# Altium PCB MiniPCBR2.PcbDoc (part 1 of 2)
Units mil, origin at the board's own origin, x right, y up, seen from the top; angles counter-clockwise.
Board outline 669.97 x 965.45 mil, 4 copper layers (Top Layer, GND, PWR, Bottom Layer), stack 30.2 mil thick; 95 components, 51 nets, 371 pads, 97 vias.
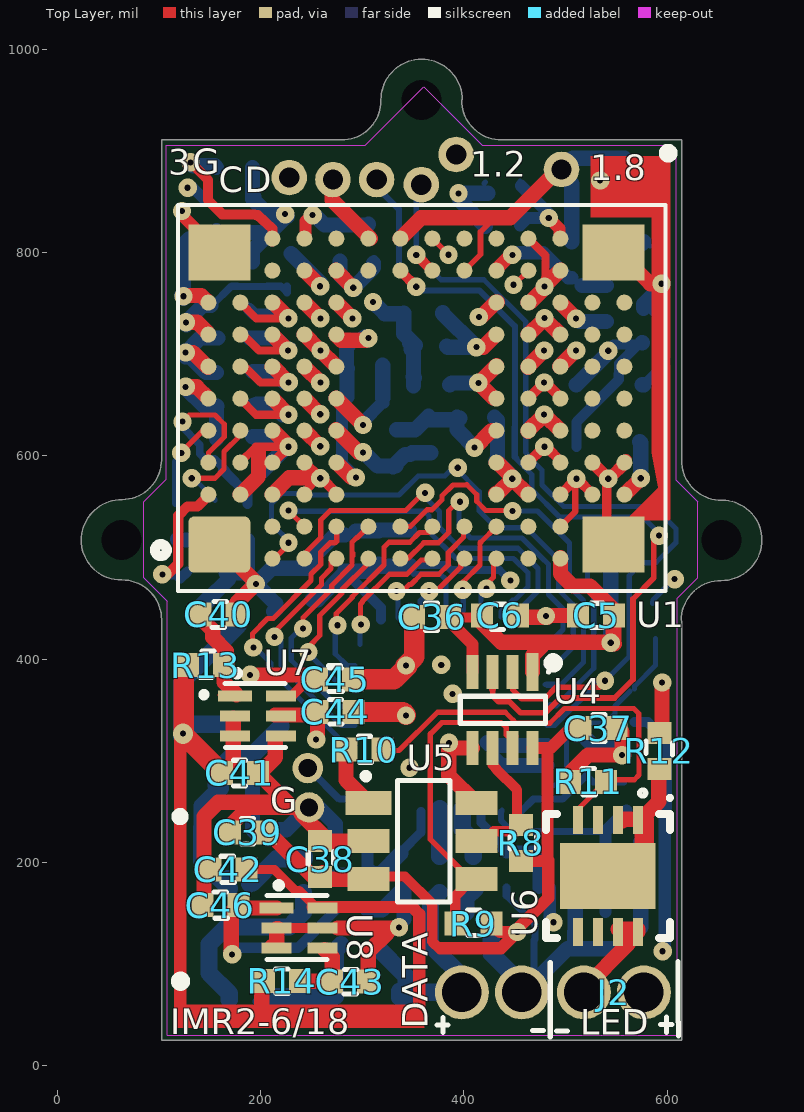
[diagram p0: Top Layer view]
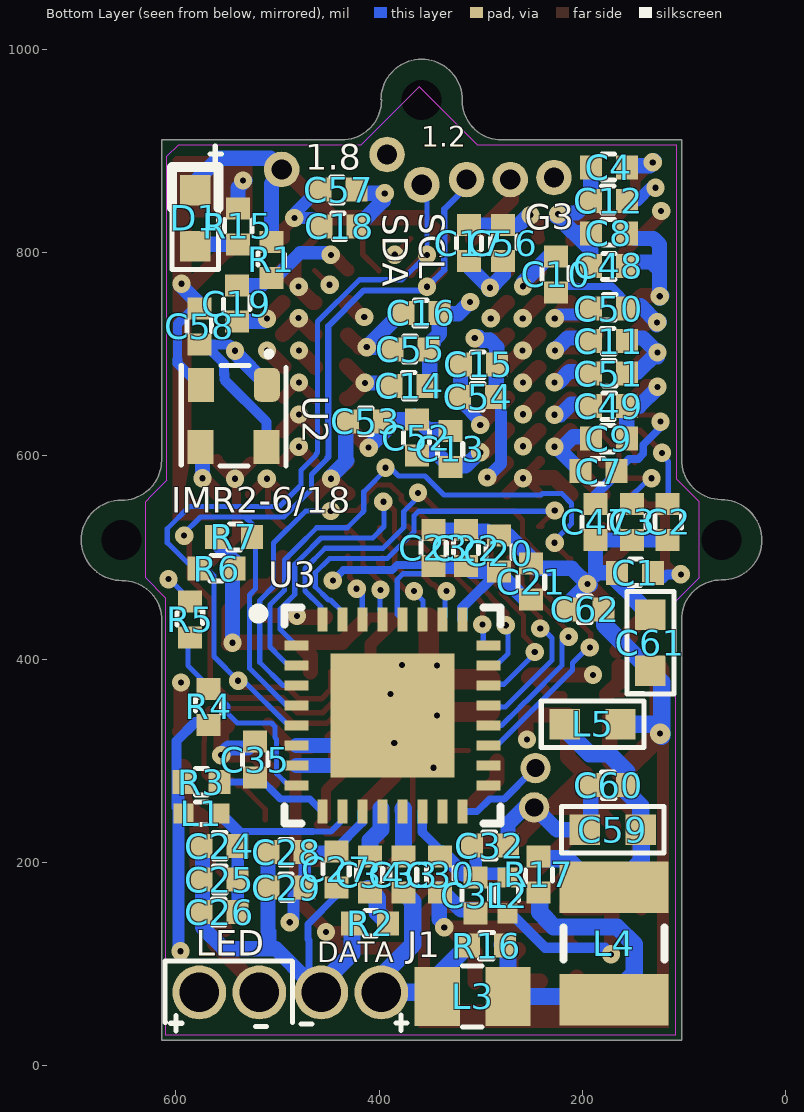
[diagram p1: Bottom Layer view, seen from below]
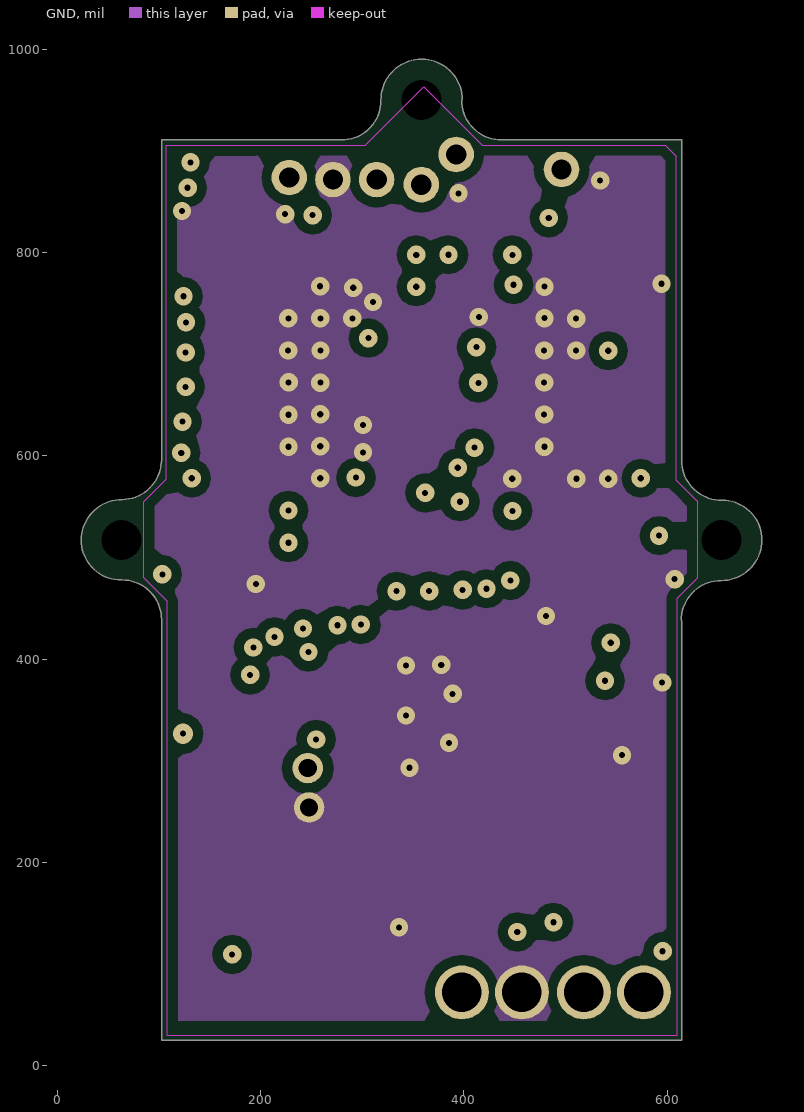
[diagram p2: GND]
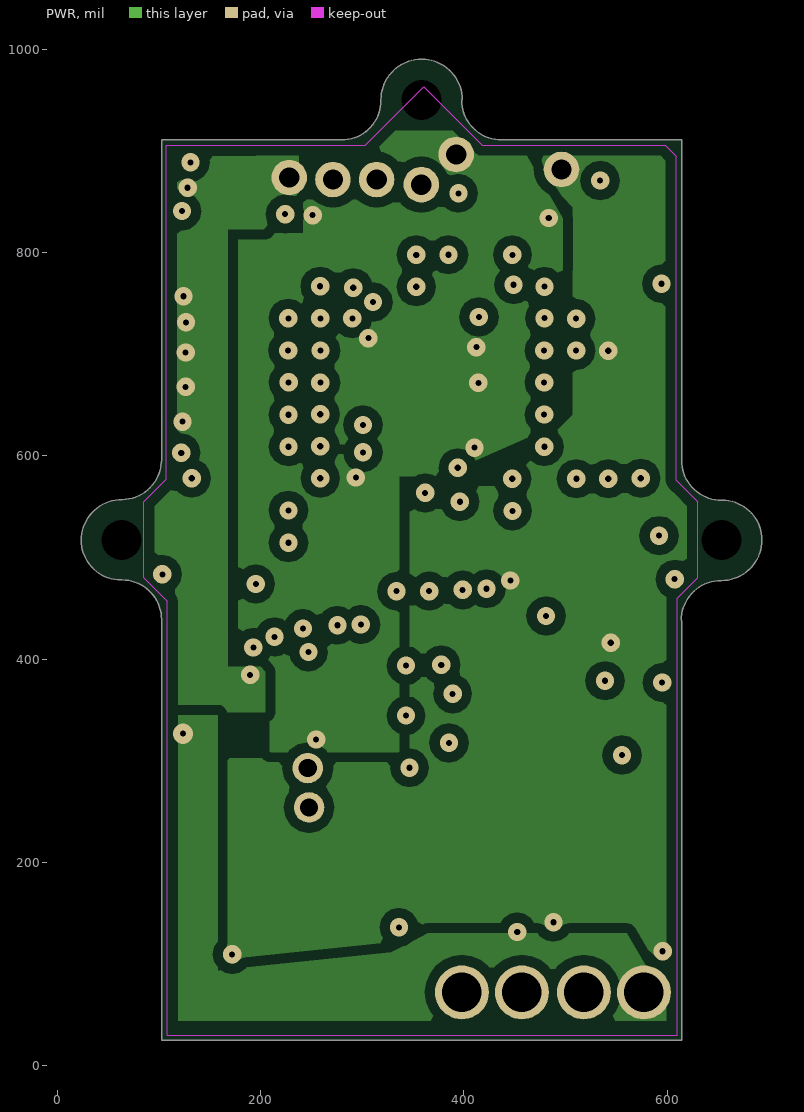
[diagram p3: PWR]

## Layer stack, top to bottom
Top Solder: solder mask 0.4, Solder Resist, Dk 3.5
Top Layer: signal copper 1.4
Dielectric1: core 6, FR-4 High TG, Dk 4.8
GND: signal copper 1.4
Dielectric2: prepreg 12.6, FR-4 High TG, Dk 4.8
PWR: signal copper 1.4
Dielectric3: core 6, FR-4 High TG, Dk 4.8
Bottom Layer: signal copper 1.4
Bottom Solder: solder mask 0.4, Solder Resist, Dk 3.5

## Board outline
62.32,477.95 63.33,477.95 cw(c63.33,438.92) 102.36,438.92 102.36,261.41 102.36,261.42 102.36,25 614.17,25 614.17,261.42 614.17,261.41 614.17,437.42 613.84,438.24 cw(c652.86,438.24) 652.86,477.27 653.2,477.27 ccw(c653.2,517.32) 693.25,517.32 ccw(c654.22,517.32) 654.22,556.35 653.54,556.35 cw(c653.54,595.72) 614.17,595.72 614.17,911.02 437.01,911.02 cw(c437.01,950.39) 397.64,950.39 398.32,950.4 ccw(c358.27,950.4) 358.27,990.45 ccw(c358.27,950.39) 318.21,950.39 318.21,949.71 cw(c279.53,949.71) 279.53,911.02 102.36,911.02 102.36,596.46 cw(c62.93,596.46) 63.5,557.03 63.33,557.03 ccw(c63.33,516.98) 23.28,516.98 ccw(c62.32,516.98)

## Design rules (kind name [scope] priority, off if disabled: settings)
Clearance "Polygon Pour Clearance" [InPolygon] p1: gap=10 ignorepadtopadclearanceinfootprint=FALSE
Clearance Clearance_1 [All] p2: gap=0 ignorepadtopadclearanceinfootprint=FALSE except(5: SMDPad-SMDPad SMDPad-THPad SMDPad-Via SMDPad-Hole THPad-THPad THPad-Via THPad-Hole Via-Via Via-Hole)
Clearance [All] p3: gap=5 ignorepadtopadclearanceinfootprint=FALSE except(10: Arc-Poly Track-Poly SMDPad-Poly THPad-Poly Via-Poly Fill-Poly Poly-Poly Poly-Region Poly-Hole)
ComponentClearance [All] p1: gap=5 collisioncheckmode=3 verticalgap=5 showdistances=TRUE
HoleSize [All] p1: absolutevalues=TRUE maxlimit=100 minlimit=5 maxpercent=80.000 minpercent=20.000
MatchedLengths [InNetClass('DIN[0..11]')] p1 off: tolerance=39.37 checknetsindiffpair=FALSE checkdiffpairvsdiffpair=TRUE checkxsignals=TRUE checkothers=TRUE
MinimumAnnularRing "PWR Annular Ring" [OnLayer('PWR')] p1: minimumring=7
MinimumAnnularRing "Layer Annular Ring" [OnLayer('GND')] p2: minimumring=7
MinimumAnnularRing [All] p3: minimumring=5
MinimumSolderMaskSliver [All] p1 off: minsoldermaskwidth=5
PolygonConnect [All] p1: thpad.connectstyle=Direct thpad.reliefconductorwidth=10 thpad.reliefentries=4 thpad.polygonreliefangle="90 Angle" thpad.airgapwidth=10 smdpad.connectstyle=Relief smdpad.reliefconductorwidth=10 smdpad.reliefentries=4 smdpad.polygonreliefangle="90 Angle" smdpad.airgapwidth=10 via.connectstyle=Direct via.reliefconductorwidth=10 via.reliefentries=4 via.polygonreliefangle="90 Angle" via.airgapwidth=10
RoomDefinition Serializer [InComponentClass('Serializer')] p1 off: confinementstyle=ConfineIn formatcopy=TRUE lockcomponents=FALSE outline -3327,-1970 -1327,-1970 -1327,-970 -3327,-970
RoomDefinition Power [InComponentClass('Power')] p2 off: confinementstyle=ConfineIn formatcopy=TRUE lockcomponents=FALSE outline -3327,-1970 -1327,-1970 -1327,-970 -3327,-970
RoomDefinition "LED Driver" [InComponentClass('LED Driver')] p3 off: confinementstyle=ConfineIn formatcopy=TRUE lockcomponents=FALSE outline -3327,-1970 -1327,-1970 -1327,-970 -3327,-970
RoomDefinition "CMOS Sensor" [InComponentClass('CMOS Sensor')] p4 off: confinementstyle=ConfineIn formatcopy=TRUE lockcomponents=FALSE outline -3327,-1970 -1327,-1970 -1327,-970 -3327,-970
RoutingVias [All] p1: holewidth=10 width=22 viastyle="Through Hole" minholewidth=5 minwidth=14 maxholewidth=28 maxwidth=50
SilkToSolderMaskClearance [IsPad] p1 off: minsilkscreentomaskgap=1 clearancetoexposedcopper=TRUE
SolderMaskExpansion [All] p1: expansion=3.5
UnConnectedPin [All] p1:
UnpouredPolygon [All] p1: allowunpoured=TRUE
Width [All] p1: maxlimit=100 minlimit=5 preferedwidth=10 minimp=50.000000 maximp=50.000000 favimp=50.000000
25 further rules are at their usual default settings.

## Classes and differential pairs
component class "CMOS Sensor": C1 C2 C3 C4 C5 C6 C7 C8 C9 C10 C11 C12 C13 C14 C15 C16 C17 C18 C19 C47 C48 C49 C50 C51 C52 C53 C54 C55 C56 C57 C58 R1 U2
component class "LED Driver": C36 C37 C38 C39 J2 R8 R9 R10 R11 R12 U4 U5 U6
component class Power: C40 C41 C42 C43 C44 C45 C46 D1 R13 R14 R15 U7 U8
component class Serializer: C20 C21 C22 C23 C24 C25 C26 C27 C28 C29 C30 C31 C32 C33 C34 C35 C59 C60 C61 C62 J1 L1 L2 L3 L4 L5 R2 R3 R4 R6 R7 R16 R17 U3
net class DIN[0..11]: DIN0 DIN1 DIN2 DIN3 DIN4 DIN5 DIN6 DIN7 DIN8 DIN9 DIN10 DIN11

## Components (designator, comment, footprint, x,y, rotation, side; value= is the part's Value field where it differs from the comment)
C1 "1uF" "SMD CAP 0402" 148,485 r180 bottom value=C?
C2 "0.1uF" "SMD CAP 0402" 116,535 r90 bottom value=C?
C3 "1uF" "SMD CAP 0402" 151,535 r90 bottom value=C?
C4 "0.22uF" "SMD CAP 0402" 174,884 r180 bottom value=C?
C5 "0.01uF" "SMD CAP 0402" 530,443 r0 top value=C?
C6 "10uF" "SMD CAP 0402" 435.23,443.13 r180 top value=C?
C7 "10uF" "SMD CAP 0402" 184,585 r180 bottom value=C?
C8 "10uF" "SMD CAP 0402" 174,819 r180 bottom value=C?
C9 "10uF" "SMD CAP 0402" 174,617 r180 bottom value=C?
C10 "10uF" "SMD CAP 0402" 225.95,778.75 r270 bottom value=C?
C11 "1uF" "SMD CAP 0402" 174,713 r180 bottom value=C?
C12 "10uF" "SMD CAP 0402" 174,851 r180 bottom value=C?
C13 "1uF" "SMD CAP 0402" 330,607 r270 bottom value=C?
C14 "1uF" "SMD CAP 0402" 370,669 r180 bottom value=C?
C15 "4.7uF" "SMD CAP 0402" 302,690 r0 bottom value=C?
C16 "4.7uF" "SMD CAP 0402" 358.5,740.7 r180 bottom value=C?
C17 "4.7uF" "SMD CAP 0402" 311.5,809.5 r270 bottom value=C?
C18 "4.7uF" "SMD CAP 0402" 439,826 r180 bottom value=C?
C19 "1uF" "SMD CAP 0402" 540,750 r90 bottom value=C?
C20 "0.1uF" "SMD CAP 0402" 282.3,504.22 r90 bottom value=C?
C21 "0.01uF" "SMD CAP 0402" 250.4,476.2 r90 bottom value=C?
C22 "0.1uF" "SMD CAP 0402" 314.5,509.2 r90 bottom value=C?
C23 "0.01uF" "SMD CAP 0402" 346.3,509.4 r90 bottom value=C?
C24 "0.1uF" "SMD CAP 0402" 557,216 r0 bottom value=C?
C25 "0.01uF" "SMD CAP 0402" 557,183 r0 bottom value=C?
C26 "10uF" "SMD CAP 0402" 557,151 r0 bottom value=C?
C27 "0.1uF" "SMD CAP 0402" 442,193 r270 bottom value=C?
C28 "0.01uF" "SMD CAP 0402" 491,210 r0 bottom value=C?
C29 "10uF" "SMD CAP 0402" 491,175 r0 bottom value=C?
C30 "0.1uF" "SMD CAP 0402" 340,188 r270 bottom value=C?
C31 "0.01uF" "SMD CAP 0402" 305.02,167.6 r270 bottom value=C?
C32 "15uF" "SMD CAP 0402" 291.06,216.57 r180 bottom value=C?
C33 "0.1uF" "SMD CAP 0402" 376,188 r270 bottom value=C?
C34 "0.047uF" "SMD CAP 0402" 409,188 r270 bottom value=C?
C35 "1uF" "SMD CAP 0402" 522,301 r90 bottom value=C?
C36 "0.1uF" "SMD CAP 0402" 368.69,441.57 r0 top value=C?
C37 "4.7uF" "SMD CAP 0402" 532.19,332.11 r0 top value=C?
C38 "0.1uF" "SMD CAP 0402" 258.47,203.12 r90 top value=C?
C39 "4.7uF" "SMD CAP 0402" 187.35,229.6 r180 top value=C?
C40 "4.7uF" "SMD CAP 0402" 158.4,444 r0 top value=C?
C41 "4.7uF" "SMD CAP 0402" 179.5,288 r0 top value=C?
C42 "4.7uF" "SMD CAP 0402" 168,193 r0 top value=C?
C43 "1uF" "SMD CAP 0402" 288,82.5 r0 top value=C?
C44 "1uF" "SMD CAP 0402" 273.5,348 r0 top value=C?
C45 "1uF" "SMD CAP 0402" 273.1,380.2 r0 top value=C?
C46 "1uF" "SMD CAP 0402" 160.3,157.8 r0 top value=C?
C47 "0.1uF" "SMD CAP 0402" 187,535 r90 bottom value=C?
C48 "0.1uF" "SMD CAP 0402" 174,787 r180 bottom value=C?
C49 "0.1uF" "SMD CAP 0402" 174,649 r180 bottom value=C?
C50 "0.1uF" "SMD CAP 0402" 174,745 r180 bottom value=C?
C51 "0.1uF" "SMD CAP 0402" 174,681 r180 bottom value=C?
C52 "0.01uF" "SMD CAP 0402" 363,618 r270 bottom value=C?
C53 "0.01uF" "SMD CAP 0402" 413,634 r0 bottom value=C?
C54 "0.1uF" "SMD CAP 0402" 302.6,658.1 r0 bottom value=C?
C55 "0.1uF" "SMD CAP 0402" 369,705 r180 bottom value=C?
C56 "0.1uF" "SMD CAP 0402" 278,809.5 r270 bottom value=C?
C57 "0.1uF" "SMD CAP 0402" 440,862 r180 bottom value=C?
C58 "0.01uF" "SMD CAP 0402" 576.77,727.56 r270 bottom value=C?
C59 "4.7uF" "SMD Capacitor 0603" 170,232 r0 bottom value=C?
C60 "0.1uF" "SMD CAP 0402" 174,276 r0 bottom value=C?
C61 "4.7uF" "SMD Capacitor 0603" 133,416 r90 bottom value=C?
C62 "0.1uF" "SMD CAP 0402" 197,449 r0 bottom value=C?
D1 "LED 0603" LED_0603 581,834 r270 bottom
J1 "Coax Connector" "Coax Direct Solder ThroughHoles" 397.94,72 r270 bottom
J2 "Coax Connector" "Coax Direct Solder ThroughHoles" 577.06,72 r270 top
L1 "Ferrite Bead" "Ferrite Bead 402" 575,248 r180 bottom
L2 "Ferrite Bead" "Ferrite Bead 402" 273.81,167.6 r270 bottom
L3 "Ferrite Bead" CIG21L4R7MNE 308,68 r180 bottom
L4 "Ferrite Bead" CBC3225T101MR 169,120 r90 bottom
L5 "Ferrite Bead" BLM18KG601SN1D 190,336 r180 bottom
R1 "100K" "SMD RES 0402" 506,793 r90 bottom value=?
R2 "49.9" "SMD RES 0402" 409,140 r0 bottom value=?
R3 "100k" "SMD RES 0402" 575,279 r180 bottom value=?
R4 "10k" "SMD RES 0402" 568,353 r270 bottom value=?
R5 "100k" "SMD RES 0402" 586,439 r270 bottom value=?
R6 "1k" "SMD RES 0402" 560,489 r180 bottom value=?
R7 "1k" "SMD RES 0402" 543,520 r0 bottom value=?
R8 "1K" "SMD RES 0402" 456.1,219.1 r270 top value=?
R9 "1K" "SMD RES 0402" 409.15,139.6 r0 top value=?
R10 "4.02K" "SMD RES 0402" 302,311 r0 top value=?
R11 "1K" "SMD RES 0402" 522.2,279.1 r0 top value=?
R12 "10" "SMD RES 0402" 592.21,309.81 r270 top value=?
R13 "10k" "SMD RES 0402" 146,394 r180 top value=?
R14 "10k" "SMD RES 0402" 221,83 r180 top value=?
R15 "500" "SMD RES 0402" 539,826 r270 bottom value=?
R16 "1k" "SMD RES 0402" 294,118 r180 bottom value=?
R17 "1k" "SMD RES 0402" 243,188 r90 bottom value=?
U1 "SonyIMX290LLR-C" "110-LGA - Thin" 148.39,562.01 r0 top
U2 "DSC1001DI1-074.2500" CDFN 510.86,670.05 r270 bottom
U3 "DS90UR913A" "WQFN32 for DS90UB913A" 387.13,344.47 r180 bottom locked
U4 "MAX14595ETA+T" "8 TDFN" 467.49,387.4 r180 top
U5 "DAC5571IDBVR" DBV 305.9,183.4 r0 top
U6 "LT3092EDD#PBF" LT-DD-8_V 541.59,186.66 r270 top
U7 "TLV71128512DSET" DSE 174.62,363.68 r270 top
U8 "TPS72718DSER" DSE 215.62,154.99 r270 top

## Footprints (in the part's own frame and the unit in brackets; to place one, negate y for a bottom-side part, rotate by r counter-clockwise, add the part's x,y. Pads: shape width x height; smd on the part's side, far side on the other; paste and mask are expansions set on the pad)
"8 TDFN" [mm]
  rect 0.3x0.95 smd: 1(0,0)
  rect 0.3x0.85 smd: 2(0.5,0) 3(1,0) 4(1.5,0) 5(1.5,1.9) 6(1,1.9) 7(0.5,1.9) 8(0,1.9)
  silkscreen extent -0.4,0 1.81,1.29, body extent -0.32,-0.53 1.83,2.44, height 0.8
"110-LGA - Thin" [mm]
  rrect20% 1.55x1.4 smd: 1-A1(0.275,-1.25)
  round 0.4 smd: 2-A3(0,0) 3-A4(0,0.8) 4-A5(0,1.6) 5-A6(0,2.4) 6-A7(0,3.2) 7-A8(0,4) 8-A9(0,4.8) 10-B3(0.8,0) 11-B4(0.8,0.8) 12-B5(0.8,1.6) 13-B6(0.8,2.4) 14-B7(0.8,3.2) 15-B8(0.8,4) 16-B9(0.8,4.8) 17-C1(1.6,-1.6) 18-C2(1.6,-0.8) 19-C3(1.6,0) 20-C4(1.6,0.8) 21-C5(1.6,1.6) 22-C6(1.6,2.4) 23-C7(1.6,3.2) 24-C8(1.6,4) 25-C9(1.6,4.8) 26-C10(1.6,5.6) 27-C11(1.6,6.4) 28-D1(2.4,-1.6) 29-D2(2.4,-0.8) 30-D3(2.4,0) 31-D4(2.4,0.8) 32-D5(2.4,1.6) 33-D6(2.4,2.4) 34-D7(2.4,3.2) 35-D8(2.4,4) 36-D9(2.4,4.8) 37-D10(2.4,5.6) 38-D11(2.4,6.4) 39-E1(3.2,-1.6) 40-E2(3.2,-0.8) 41-E3(3.2,0) 42-E4(3.2,0.8) 43-E5(3.2,1.6) 44-E6(3.2,2.4) 45-E7(3.2,3.2) 46-E8(3.2,4) 47-E9(3.2,4.8) 48-E10(3.2,5.6) 49-E11(3.2,6.4) 50-F1(4,-1.6) 51-F2(4,-0.8) 53-F10(4,5.6) 54-F11(4,6.4) 55-G1(4.8,-1.6) 56-G2(4.8,-0.8) 56-G10(4.8,5.6) 57-G11(4.8,6.4) 58-H1(5.6,-1.6) 59-H2(5.6,-0.8) 60-H10(5.6,5.6) 61-H11(5.6,6.4) 62-J1(6.4,-1.6) 63-J2(6.4,-0.8) 64-J10(6.4,5.6) 65-J11(6.4,6.4) 66-K1(7.2,-1.6) 67-K2(7.2,-0.8) 68-K3(7.2,0) 69-K4(7.2,0.8) 70-K5(7.2,1.6) 71-K6(7.2,2.4) 72-K7(7.2,3.2) 73-K8(7.2,4) 74-K9(7.2,4.8) 75-K10(7.2,5.6) 76-K11(7.2,6.4) 77-L1(8,-1.6) 78-L2(8,-0.8) 79-L3(8,0) 80-L4(8,0.8) 81-L5(8,1.6) 82-L6(8,2.4) 83-L7(8,3.2) 84-L8(8,4) 85-L9(8,4.8) 86-L10(8,5.6) 87-L11(8,6.4) 88-M1(8.8,-1.6) 89-M2(8.8,-0.8) 90-M3(8.8,0) 91-M4(8.8,0.8) 92-M5(8.8,1.6) 93-M6(8.8,2.4) 94-M7(8.8,3.2) 95-M8(8.8,4) 96-M9(8.8,4.8) 97-M10(8.8,5.6) 98-M11(8.8,6.4) 99-N3(9.6,0) 100-N4(9.6,0.8) 101-N5(9.6,1.6) 102-N6(9.6,2.4) 103-N7(9.6,3.2) 104-N8(9.6,4) 105-N9(9.6,4.8) 107-P3(10.4,0) 108-P4(10.4,0.8) 109-P5(10.4,1.6) 110-P6(10.4,2.4) 111-P7(10.4,3.2) 112-P8(10.4,4) 113-P9(10.4,4.8)
  rect 1.55x1.4 smd: 9-A11(0.275,6.05) 106-P1(10.125,-1.25) 114-P11(10.125,6.05)
  silkscreen extent -1.29,-2.41 11.43,7.24, body extent -0.7,-2.37 11.38,7.18, height 1.6
BLM18KG601SN1D [mil]
  rect 30x30 smd: 1(-27.5,0) 2(27.5,0)
  silkscreen extent -50,-23 50,23, body extent -32,-15 32,15, height 19
CBC3225T101MR [mm]
  rect 1.29x2.72 smd: 1(-1.405,0) 2(1.405,0)
  silkscreen extent -0.4,-1.26 0.4,1.26, body extent -1.7,-1.35 1.7,1.35, height 2.7
CDFN [mm]
  rrect50% 0.85x0.65 smd: 1(0,0.008)
  rect 0.85x0.65 smd: 2(0,-1.642) 3(1.55,-1.65) 4(1.55,0)
  silkscreen extent -0.78,-2.13 2.03,0.48, body extent -0.43,-2.13 1.93,0.48, height 1.45
CIG21L4R7MNE [mm]
  rect 1.13x1.47 smd: 1(-0.885,0) 2(0.885,0)
  body extent -1.1,-0.72 1.1,0.72, height 1.05
"Coax Direct Solder ThroughHoles" [mil]
  round 53 hole 39 mask+0: 0(0,0) 1(0,-59.06)
DBV [mm]
  rect 1.15x0.6 smd: 1(0,1.9)
  rect 1.05x0.6 smd: 2(0,0.95) 3(0,0) 4(2.7,0) 5(2.7,0.95) 6(2.7,1.9)
  silkscreen extent -0.09,-0.58 2.04,2.61, body extent 0.46,-0.58 2.21,2.47, height 1.45
DSE [mm]
  rect 0.28x0.85 smd: 1(0,0)
  rect 0.28x0.75 smd: 2(0.5,0) 3(1,0) 4(1,1.15) 5(0.5,1.15) 6(0,1.15)
  silkscreen extent -0.6,-0.25 1.29,1.26, body extent -0.29,-0.29 1.32,1.31, height 1.45
"Ferrite Bead 402" [mm]
  rect 0.5x0.5 smd: 1(-0.45,0) 2(0.45,0)
  body extent -0.53,-0.28 0.53,0.28, height 0.5
LED_0603 [mil]
  rect 30x30 smd: A(-27.5,0) C(27.5,0)
  silkscreen extent -51,-23 51,23, body extent -32,-15 32,15, height 20
LT-DD-8_V [mm]
  rect 0.7x0.25 smd mask+0.102: 1(-1.4,0.75) 2(-1.4,0.25) 3(-1.4,-0.25) 4(-1.4,-0.75) 5(1.4,-0.75) 6(1.4,-0.25) 7(1.4,0.25) 8(1.4,0.75)
  rect 1.65x2.38 smd mask+0.102: 9(0,0)
  silkscreen extent -2,-1.55 1.55,1.6, body extent -1.5,-1.5 1.5,1.5, height 0.8
"SMD CAP 0402" [mm]
  rect 0.55x0.6 smd: 0(-0.45,0) 1(0.45,0)
  body extent -0.53,-0.28 0.53,0.28, height 0.5
"SMD Capacitor 0603" [mil]
  rect 30x30 smd: 0(-27.5,0) 1(27.5,0)
  silkscreen extent -50,-23 50,23, body extent -32,-15 32,15, height 19
"SMD RES 0402" [mm]
  rect 0.55x0.6 smd: 0(-0.45,0) 1(0.45,0)
  body extent -0.53,-0.28 0.53,0.28, height 0.5
"WQFN32 for DS90UB913A" [mm]
  rect 0.6x0.25 smd mask+0: 1(-2.4,1.75) 2(-2.4,1.25) 3(-2.4,0.75) 4(-2.4,0.25) 5(-2.4,-0.25) 6(-2.4,-0.75) 7(-2.4,-1.25) 8(-2.4,-1.75) 17(2.4,-1.75) 18(2.4,-1.25) 19(2.4,-0.75) 20(2.4,-0.25) 21(2.4,0.25) 22(2.4,0.75) 23(2.4,1.25) 24(2.4,1.75)
  rect 0.25x0.6 smd mask+0: 9(-1.75,-2.4) 10(-1.25,-2.4) 11(-0.75,-2.4) 12(-0.25,-2.4) 13(0.25,-2.4) 14(0.75,-2.4) 15(1.25,-2.4) 16(1.75,-2.4) 25(1.75,2.4) 26(1.25,2.4) 27(0.75,2.4) 28(0.25,2.4) 29(-0.25,2.4) 30(-0.75,2.4) 31(-1.25,2.4) 32(-1.75,2.4)
  rect 3.1x3.1 smd paste-4: 33(0,0)
  silkscreen extent -3.48,-2.7 2.7,2.7, body extent -2.55,-2.55 2.55,2.55, height 0.8

## Part data
C1 C2 C3 C4 C5 C6 C7 C8 C9 C10 C11 C12 C13 C14 C15 C16 C17 C18 C19 C20 C21 C22 C23 C24 C25 C26 C27 C28 C29 C30 C31 C32 C33 C34 C35 C36 C37 C38 C39 C40 C41 C42 C43 C44 C45 C46 C47 C48 C49 C50 C51 C52 C53 C54 C55 C56 C57 C58 C59 C60 C61 C62: library part Capacitor
D1: "LTST_C195TBJRKT"
R1 R2 R3 R4 R5 R6 R7 R8 R9 R10 R11 R12 R13 R14 R15 R16 R17: library part Resistor
U1: library part IMX290LLR-C, "Sony Image Sensor"
U2: library part "Microchip Oscillator", "74.25MHz Oscillator"
U3: "DS90UR913ASERIALIZER"
U4: "Level Translator"
U5: library part DAC5571
U6: "200 mA Two-Terminal Programmable Current Source, 0.3 mA Isupply, 8-pin SON (DD-8), -40 to 125 degC, Pb-Free", Extended Temp="E, I, MP", Manufacturer="Linear Technology", Output Current Range="0.5 mA to 200 mA", Supplier Part Number 1=LT3092EDD#PBF-ND, Code_JEDEC=MO-229, ComponentLink1Description="Manufacturer URL", ComponentLink1URL=http://www.linear.com/, ComponentLink2Description=Datasheet, ComponentLink2URL=http://cds.linear.com/docs/en/datasheet/3092fb.pdf, ComponentLink3Description="Package Specification", ComponentLink3URL=http://cds.linear.com/docs/en/packaging/DFN_8_05-08-1698.pdf, DatasheetVersion="Rev. B", Initial Accuracy(%)=1, Isupply(mA)=0.3, Mounting Technology="Surface Mount", PackageDescription="8-Pin Plastic DFN, Body 3 x 3 mm, Pitch 0.5 mm", PackageReference=DD-8, PackageVersion=Jun-10, PartNumber=LT3092EDD#PBF, RoHS=TRUE, Supplier 1=Digi-Key, Supplier 2=Farnell, Supplier 3=Newark, Supplier Part Number 2=2295468, Supplier Part Number 3=72R5810, Vin Max(V)=40, Vin Min(V)=1.2
U7: "Dual 2.85V and 1.2V Linear Regulator"
U8: "Single 1.8V Linear Regulator"

## Free pads (board coordinates)
  round 35 hole 20: 1(228,874) 1(271,872) 2(314,872) 3(358,867) 3(392.27,896.7) 3(496,882)
  round 30 hole 18: 3(246.16,292.75) 3(247.5,254)
  round 0 hole 39.37 unplated: NA(62.99,517.32) NA(358.27,950.39) NA(653.54,517.32)

## Via types
v1: diameter 18, hole 6, Top Layer to Bottom Layer, tented both sides, 96 vias
v2: diameter 20, hole 6, Top Layer to Bottom Layer, tented both sides, 1 vias

## Nets (pads, with @x,y where several pads share a name; then routed paths per layer and width w, separated by ;. In a path a pad name is that pad's centre, name@x,y a point inside that pad or via, vN(x,y) a via of type N, cw(c..) or ccw(c..) an arc to the next point about the centre after c; other vN are vias at no path point)
"1.2V VDD": C13.0 C14.0 C15.0 C16.0 C17.0 C18.0 C44.0 C52.0 C53.0 C54.0 C55.0 C56.0 C57.0 pad.3@392.27,896.7 U1.38-D11 U1.42-E4 U1.46-E8 U1.70-K5 U1.71-K6 U1.72-K7 U1.73-K8 U1.98-M11 U7.5 | length 822.9
  Top Layer w5.12: U1.42-E4@274.37,593.51 U1.42-E4@277.35,593.51 ; v1@411.42,607.48 v1@414.33,607.48 ; U1.73-K8@425.4,719.49 U1.73-K8@431.85,719.49
  Top Layer w7: U1.70-K5@431.85,625 U1.70-K5@435.65,625
  Top Layer w10: C44.0@251.5,344.5 C44.0@253.5,342.5
  Top Layer w12: U1.38-D11@242.88,813.98 244,815.1 244,831 v1@251,838 ; v1(483.46,834.25) 494,823.72 U1.98-M11@494,814
  Top Layer w15: U7.5@214,345 252.78,345 C44.0@255.78,348 255.78,322.04 v1@254,320.25 ; U1.46-E8@274,719 279.06,713.94 303.88,713.94 v1(305.91,715.96) ; U1.42-E4@275,593 289.26,578.74 v1(293.55,578.74) ; v1@409.7,607.45 427.25,625 U1.70-K5@431.85,625 ; v1(412.2,707.09) 419.09,707.09 U1.73-K8@431,719 ; v1@413.75,672.45 v1@414.3,671.9 ; U1.71-K6@431.85,656.5 429.7,656.5 v1@414.3,671.9 ; U1.72-K7@432,689 414.9,671.9 v1@414.3,671.9
  Bottom Layer w5.12: v1@292,578.74 v1(293.55,578.74) ; C17.0@308.78,827.22 C17.0@309.5,826.5 ; v1@411.02,607.09 v1@411.57,606.54 ; C57.0@454.33,868.5 C57.0@455.12,867.72 ; C57.0@455.22,870.27 455.12,870.17 C57.0@455.12,867.72 ; C57.0@455.51,867.32 C57.0@455.12,867.72
  Bottom Layer w10: C54.0@284.88,658.6 C54.0@286.28,660 ; C15.0@285.78,689.5 C15.0@285.78,691.72 ; C15.0@285.78,693.28 C15.0@285.78,691.72 ; C15.0@286.28,691.22 C15.0@285.78,691.72
  Bottom Layer w12: C54.0@282,658 280,656 280,592.29 v1(293.55,578.74) ; C18.0@455,827 462.25,834.25 v1(483.46,834.25) 483.46,838.54 C57.0@456,866
  Bottom Layer w15: v1@252,838 262.78,827.22 C56.0@278,827.22 305.22,827.22 C17.0@306,828 ; C15.0@284.28,689.3 C15.0@284.28,690 284.28,707.28 290.94,713.94 299.06,713.94 302.12,717 v1@305,717 ; C54.0@284.88,658.1 284.88,658.6 284.88,685.88 C15.0@285,686 ; C13.0@333.7,625.72 351.72,625.72 C52.0@365,639 ; C52.0@363,635.72 C53.0@393,635.72 ; C16.0@379,741 379,740.29 v1(412.2,707.09) 383.91,707.09 C55.0@383,708 ; C14.0@386,670 387.9,671.9 v1(414.1,671.9) ; C53.0@393,638 C53.0@393,635.72 ; C53.0@396,637 394.72,635.72 C53.0@393,635.72 ; v1@411.42,607.48 393,625.9 C53.0@393,635.72
  other v1: 254.5,321 410.36,608.12 251,837
"1.8V VDD": C5.1 C6.1 C20.0 C21.0 C22.0 C23.0 C27.0 C28.0 C29.0 C36.1 C46.1 C58.1 D1.A L1.1 L2.2 pad.3@496,882 R1.1 R3.0 R4.1 R6.1 R7.1 U1.57-G11 U1.64-J10 U1.88-M1 U2.1 U2.4 U3.11 U3.25 U3.28 U4.1 U4.4 U8.1 | length 2169
  Top Layer w5.5: U1.64-J10@400.36,782.48 416.23,798.35 416.23,820.46 425.38,829.61
  Top Layer w10: C36.1@386.52,441 C6.1@414.7,441
  Top Layer w12: C36.1@384,439 408.43,414.57 U4.4@408.43,387.4
  Top Layer w15: v1@171,113 171,150.78 C46.1@178.02,157.8 ; C46.1@178,159 C46.1@179,158 ; C46.1@179,159 C46.1@179,158 ; U8.1@215.62,154.99 182.02,154.99 C46.1@179,158 ; U1.57-G11@337.37,813.98 357.75,834.36 445.48,834.36 pad.3@491.54,880.42 ; C6.1@416,437 436.37,416.63 v1@547.72,416.63 ; U4.1@467.49,387.4 467.49,403.49 476,412 ; U1.88-M1@495,500 495,484 507,472 524,472 547.72,448.28 C5.1@547.72,443 v1@547.72,416.63 ; 547,426.6 C5.1@547,446 ; v1@548,415 547.72,415.28 v1@547.72,416.63
  Bottom Layer w5: C22.0@314.68,492.12 314.91,491.89 315.21,491.59 C22.0@315.32,491.48 ; C23.0@346.3,491.68 C23.0@346.68,491.68 ; C23.0@347,492.2 C23.0@356.8,492.2 ; C23.0@348.25,485.6 C23.0@350.45,483.4 ; C23.0@352.4,484.03 376.49,484.03 382.2,478.32 382.2,443.87 U3.28@377.28,438.96 ; 382.2,492.52 382.38,492.7 382.72,493.04
  Bottom Layer w7.5: C23.0@340.9,492.7 382.38,492.7 387.4,487.68 435.32,487.68 v1(445.6,477.4)
  Bottom Layer w8: C21.0@248.88,458.78 248.58,458.48 C21.0@250.4,458.48 ; v1@598,112 v1@599.5,113.5
  Bottom Layer w9: U3.11@416.65,249.98 416.65,239.35 C27.0@443,213
  Bottom Layer w10: v1@173,111 178,116 236.72,116 L2.2@274,153.28 ; C20.0@283.45,485.6 318.23,450.82 U3.25@318.23,438.96 ; C22.0@317.48,491.48 C22.0@320,494 ; U2.4@510.86,609.03 510.86,633.57 552.4,675.11 552.4,680.37 ; v1@540.5,703 547.34,709.84 C58.1@571.62,709.84 ; 552.7,680.37 552.7,690.92 C58.1@571.62,709.84 ; R4.1@568,338 581,338 599.5,319.5 L1.1@599.5,254 ; C58.1@576.77,709.84 C58.1@571.62,709.84
  Bottom Layer w12: C27.0@439,213 C27.0@442,210 ; C27.0@442,210.72 472.72,210.72 C28.0@473,211 ; C29.0@473.28,175 473.28,208.28 C28.0@475,210 ; C29.0@474,185 484.4,174.6 484.4,144.6 v1(488,141) ; v1(595.5,112.5) 597.54,114.54 597.54,284.04 R3.0@598.5,285
  Bottom Layer w15: C21.0@250.4,458.48 256.08,458.48 C20.0@283.2,485.6 ; C20.0@282.3,486.5 309.05,486.5 314.68,492.12 C22.0@315.95,493.4 ; C22.0@315.32,491.48 317.48,491.48 C23.0@346.3,491.48 ; C23.0@346.49,491.49 346.68,491.68 C23.0@347,492 ; pad.3@494,880 506,868 R1.1@506,810.72 ; pad.3@496,882 507,893 558,893 D1.A@582,869 ; U2.1@510.54,670.05 542.6,702.11 v1@542.6,703 ; R6.1@542.28,490 542.28,496.28 563,517 R7.1@563,524 ; R6.1@543.55,487.81 544.45,486.91 v1(544.45,416.09) ; C58.1@575.3,711.6 C58.1@575.5,711.4
  other v1: 171.8,109.4 542,703.5
"2.9V VDD": C7.1 C8.1 C9.1 C10.1 C11.1 C12.1 C45.0 C47.1 C48.1 C49.1 C50.1 C51.1 pad.1@228,874 U1.3-A4 U1.5-A6 U1.6-A7 U1.7-A8 U1.8-A9 U7.6 | length 846
  Top Layer w5.12: v1@121.67,759.28 v1@122.27,759.28 ; v1@122.27,758.74 v1@122.81,759.28 ; v1@126,666 v1(126,668) ; 129.44,640.44 154.78,640.44 164,631.22 164,618.79 148.39,603.18 U1.3-A4@148.39,593.51
  Top Layer w10: U7.6@219.9,363.68 230.49,363.68 248,381.2 C45.0@255.6,381.2 ; C45.0@251.15,385.65 C45.0@251.5,386
  Top Layer w15: v1@123,758 141.39,758 U1.8-A9@148.39,750.99 ; v1(126,668) 137,668 U1.5-A6@148,657 ; v1(126.02,701.71) 133.29,701.71 U1.6-A7@148,687 ; v1(126.38,731.5) 137.5,731.5 U1.7-A8@148,721 ; v1(189.5,384.5) 250.5,384.5 C45.0@253,382
  Bottom Layer w7: C50.1@152,748 171,767 177.06,767 177.37,766.69 206.06,766.69 206.38,767 219.98,767 C10.1@225.95,761.03
  Bottom Layer w7.5: v1@121,633 121,630 140,611 140,602 145,597 154.28,597
  Bottom Layer w8: 154.28,597 C7.1@166.28,585 ; C10.1@225.95,761.03 C10.1@225.95,766.81
  Bottom Layer w10: v1@127,666 v1@127,668 ; C7.1@163,586 187,562 C47.1@187,552.72
  Bottom Layer w11: v1(128,864) 133,864 C12.1@146,851
  Bottom Layer w15: v1@122,758 124,760 124,808 130,814 148.28,814 C8.1@156.28,822 ; v1@124,732 v1@127,729 ; v1@124,755 v1@124,758 ; v1@125,703 v1@126.16,701.84 ; v1@126,667 127,666 144,649 C49.1@156.28,649 ; v1@126,697.28 v1@126,701 ; 127,786 132,791 C48.1@156.28,791 ; v1@128.1,731.5 v1(126.38,731.5) 142.88,748 C50.1@151,748 ; C9.1@156.28,617 156.28,648.28 C49.1@157,649 ; C51.1@156.28,682 146,682 v1@126.16,701.84 ; C11.1@158,716 140.32,716 v1@126.16,701.84
  other v1: 123.02,633.71 123.83,757.19
DIN0: U1.29-D2 U3.31 | length 348.3
  Top Layer w5.12: v1@227.91,545.36 228.04,545.36 U1.29-D2@242.88,530.51 ; U1.29-D2@239.8,530.6 U1.29-D2@239.8,532.5
  Bottom Layer w5.12: v1(227.18,546.4) 228.08,545.5 361.24,545.5 365.67,541.07 365.67,525.4 392.09,498.99 448.83,498.99 ; U3.31@436.4,441.7 436.4,446.76 447.97,458.33 449.95,458.33 462.86,471.24 462.86,484.96 449.15,498.67
DIN1: U1.28-D1 U3.32 | length 363.4
  Top Layer w5.12: U1.28-D1@242.88,499.02 242.88,503.67 258.94,519.73 258.94,536.91 268.29,546.26 342.61,546.26 v1@357.48,561.13
  Bottom Layer w5.12: v1@363.71,561.72 363.71,557.34 375.79,545.27 375.79,529.59 396.28,509.1 453.02,509.1 472.98,489.15 472.98,467.05 457.6,451.67 U3.32@457.6,436.3
  other v1: 361.77,563.68
DIN2: U1.40-E2 U3.19 | length 308.9
  Top Layer w5.12: v1@191.7,411.5 191.7,425 206.7,440 212.22,440 249.56,477.34 249.56,483.88 258.94,493.26 258.94,505.42 267.98,514.46 273.07,514.46 274.7,516.09 274.7,530.19 U1.40-E2@274.37,530.51
  Bottom Layer w5.12: v1@193,413 209.82,396.18 209.82,389.18 284.06,314.94 U3.19@292.64,314.94 ; U3.19@285.54,314.3 U3.19@290.3,314.3
  other v1: 192.7,411.5
DIN3: U1.39-E1 U3.20 | length 229.2
  Top Layer w5.12: v1(213.5,421.9) 213.5,426.97 259.68,473.15 259.68,479.68 269.06,489.06 269.06,496.76 U1.39-E1@272.4,500.1
  Bottom Layer w5.12: v1@217,422 219.94,419.06 219.94,394.06 255.58,358.42 255.99,358.42 261.92,352.49 261.92,352.23 279.52,334.63 U3.20@292.64,334.63
DIN4: U1.51-F2 U3.21 | length 265.9
  Top Layer w5.12: v1(241.5,430.1) 241.5,440.66 269.8,468.96 269.8,472.62 289.81,492.63 289.81,501.21 ; 290.44,504.18 290.44,501.85 289.81,501.21 ; 294.3,519.5 289.81,515.01 289.81,501.21 ; 294.58,519.22 U1.51-F2@305.87,530.51
  Bottom Layer w5.12: v1@240.8,431.4 230.06,420.66 230.06,398.94 276,353 U3.21@291,353 ; U3.21@281.21,353.6 U3.21@299.7,353.6
DIN5: U1.50-F1 U3.22 | length 173.6
  Top Layer w5.12: v1@243.8,409.6 247.74,413.54 248.36,413.54 258.06,423.24 258.06,442.91 279.91,464.77 279.91,468.43 305.87,494.39 U1.50-F1@305.87,499.02
  Bottom Layer w5.12: v1@249.4,403.1 277.4,375.1 ; 279.1,375.2 U3.22@297.64,375.2
  other v1: 246.9,407
DIN6: U1.59-H2 U3.23 | length 206.4
  Top Layer w5.12: v1@276.1,432.7 v1(275.4,433.4) 274.23,434.57 274.23,444.77 290.03,460.58 290.03,461.36 321.31,492.63 321.31,510.21 326.18,515.08 346.64,515.08 356.13,524.58 365.47,524.58 U1.59-H2@371.74,530.85
  Bottom Layer w5.12: v1@273.27,430.77 273.27,405.31 284.9,393.68 U3.23@292.64,393.68
DIN7: U1.58-H1 U3.24 | length 132.1
  Top Layer w5.12: v1@298.1,436.3 298.1,454.34 300.15,456.39 300.15,457.17 326.57,483.59 343.76,483.59 357.87,497.7 U1.58-H1@367.2,497.7 ; v1(298.5,434) v1@300.15,435.65
  Bottom Layer w5.12: U3.24@297.64,414.57 297.64,434.64 v1@300.6,437.6
DIN8: U1.63-J2 U3.26 | length 126.4
  Top Layer w5.12: v1@340.6,467.87 346.2,473.47 347.96,473.47 357.98,483.5 375.16,483.5 384.6,492.94 384.6,505.09 399.42,519.91 U1.63-J2@399.42,529.3
  Bottom Layer w5.12: v1@335.1,465.6 335.1,441 U3.26@338.6,437.5
  other v1: 333.66,466.88
DIN9: U1.62-J1 U3.27 | length 86.2
  Top Layer w5.12: v1@366,466.6 372.57,466.6 396.9,490.93 U1.62-J1@396.9,500.1 ; U1.62-J1@400.36,494.38 U1.62-J1@400.36,499.02
  Bottom Layer w5.12: U3.27@356.8,439.5 356.8,457.4 v1@366,466.6 ; v1@364.95,467.65 v1@365.3,468
  other v1: 365.7,466.9
DIN10: U1.67-K2 U3.29 | length 109.7
  Top Layer w5.12: v1@401.3,469.3 399.3,469.3 399.3,476.14 415.8,492.63 415.8,514.9 416.2,515.3 ; 416.42,515.08 U1.67-K2@431.85,530.51 U1.67-K2@431.85,524.77
  Bottom Layer w5.12: U3.29@395.2,443.9 399.3,448 v1@399.3,469.3
  other v1: 398.7,468.2
DIN11: U1.66-K1 U3.30 | length 67.9
  Top Layer w5.12: v1@421.2,472.8 429.04,480.64 429.04,496.21 U1.66-K1@431.85,499.02 ; U1.66-K1@430.24,500.64 U1.66-K1@431,501.4
  Bottom Layer w5.12: U3.30@414.3,443.3 U3.30@415.3,442.3 ; U3.30@416.6,439.7 416.6,466.8 421.7,471.9 v1@421.7,472.4
  other v1: 422.15,469.25